# Altium PCB 双红外反射传感器.PcbDoc
Units mm, origin at the board's own origin, x right, y up, seen from the top; angles counter-clockwise.
Board outline 152.4 x 101.6 mm, 2 copper layers (Top Layer, Bottom Layer); 18 components, 12 nets, 50 pads, 0 vias.
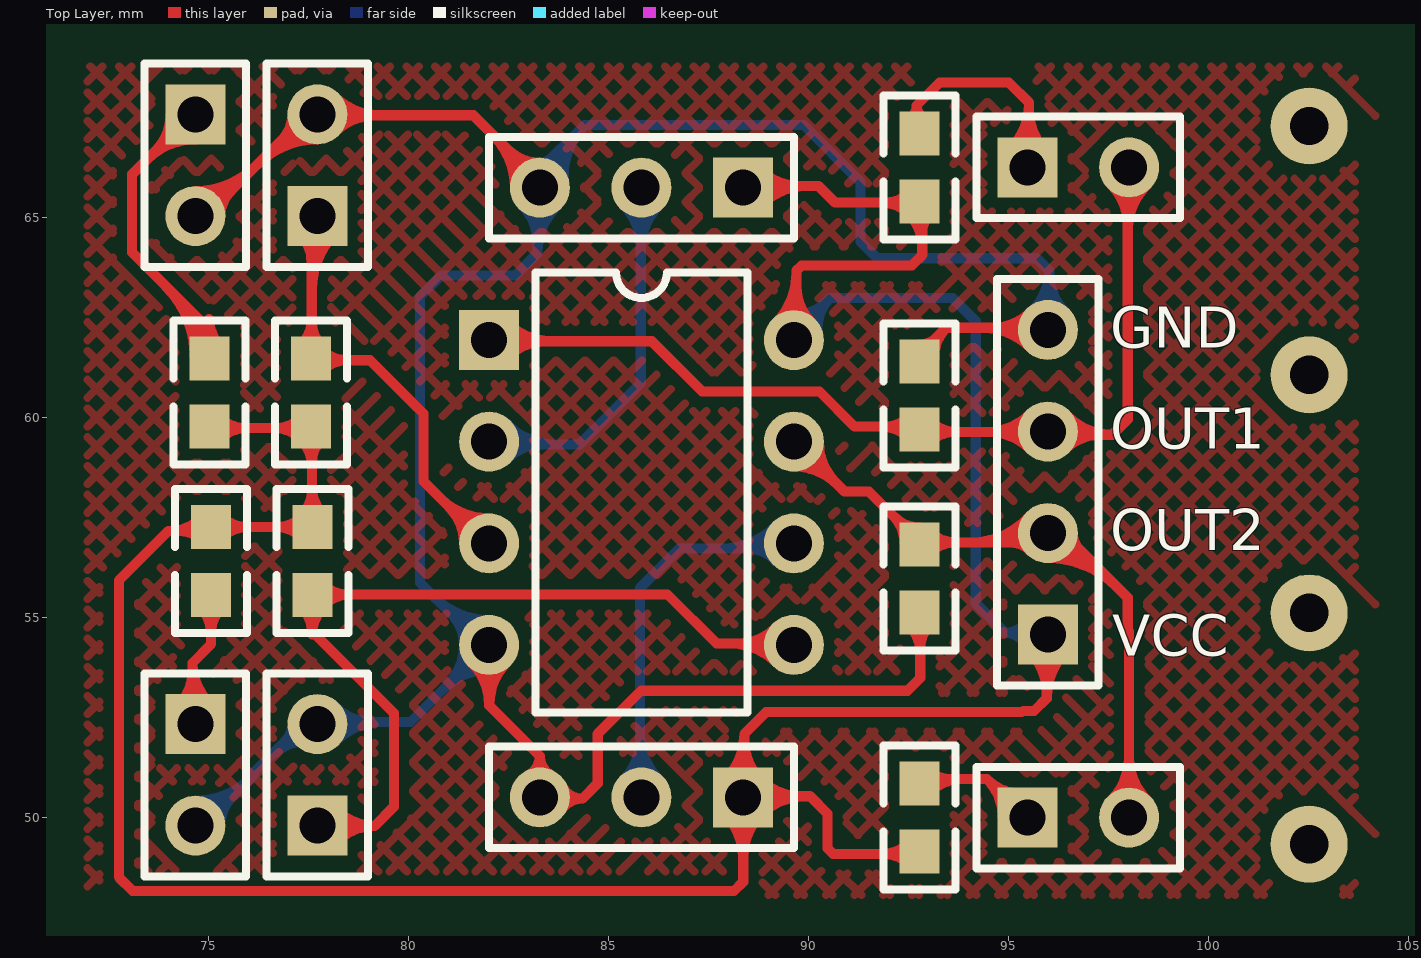
[diagram p0: Top Layer view]
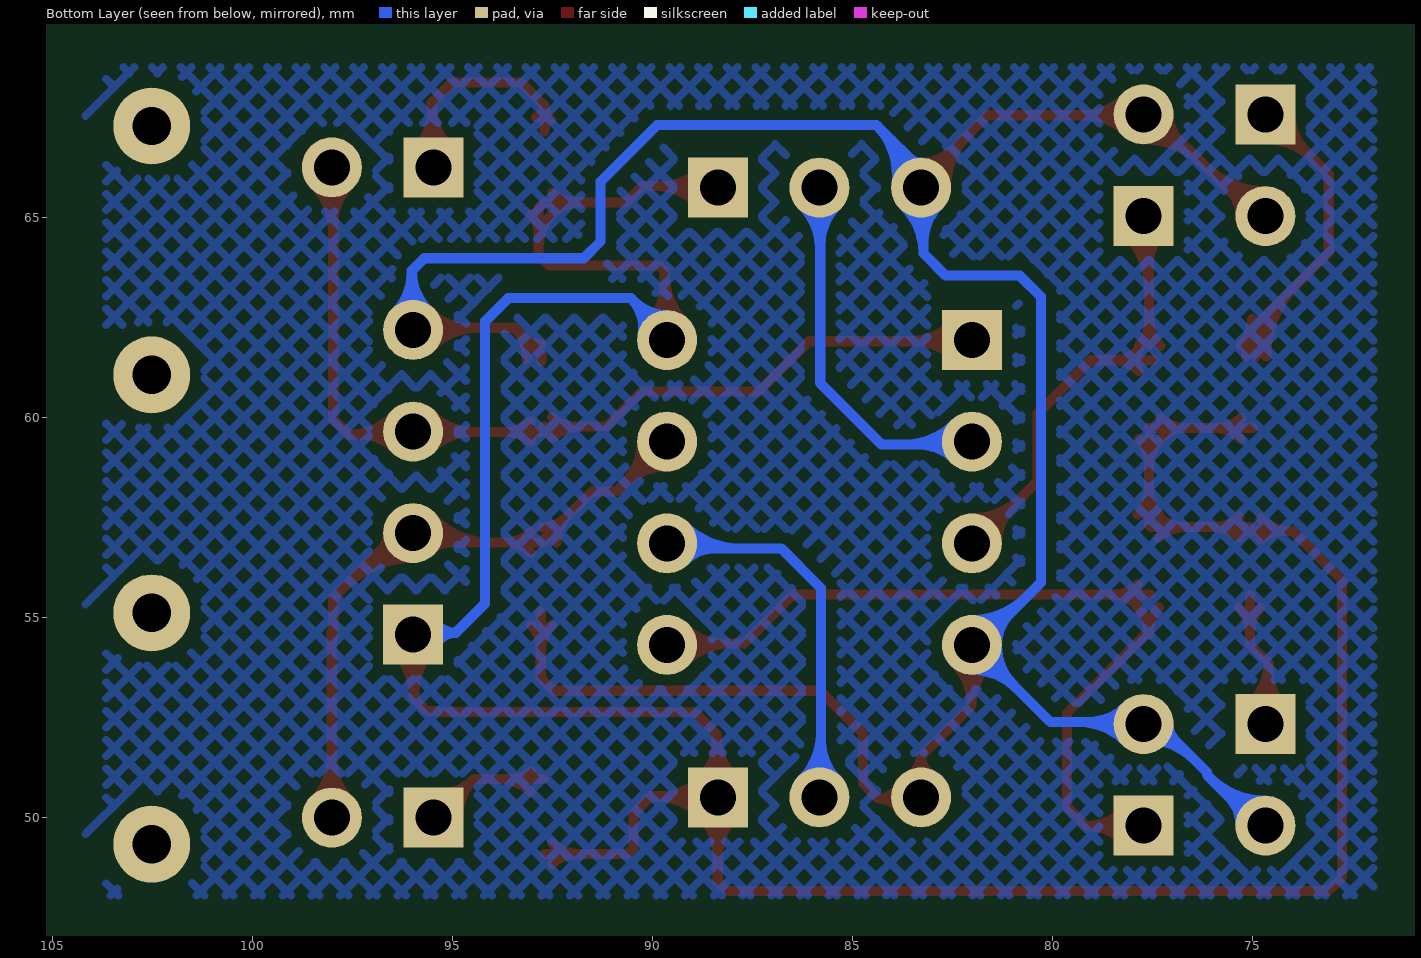
[diagram p1: Bottom Layer view, seen from below]

## Layer stack, top to bottom
Top Layer: signal copper 0.0356
Dielectric: dielectric 0.32, FR-4, Dk 4.8
Bottom Layer: signal copper 0.0356

## Board outline
25.4,25.4 177.8,25.4 177.8,127 25.4,127

## Design rules (kind name [scope] priority, off if disabled: settings)
Clearance [All] p1: gap=0.254
ComponentClearance [All] p1: gap=0.254 collisioncheckmode=3 verticalgap=0.254
PolygonConnect [All] p1: connectstyle=Relief reliefconductorwidth=0.254 reliefentries=4 polygonreliefangle="90 Angle"
RoutingVias [All] p1: holewidth=0.711 width=1.27 viastyle="Through Hole" minholewidth=0.711 minwidth=1.27 maxholewidth=0.711 maxwidth=1.27
SolderMaskExpansion [All] p1: expansion=0.102
TestPointUsage [All] p1: valid=0 allowmultiple=FALSE
Testpoint [All] p1: side=15 testpointundercomponent=TRUE minsize=1.016 maxsize=2.54 preferedsize=1.524 minholesize=0 maxholesize=1.016 preferedholesize=0.813 testpointgrid=0.025 style=1023 order=0-112345678
Width [All] p1: maxlimit=0.254 minlimit=0.254 preferedwidth=0.254
17 further rules are at their usual default settings.

## Components (designator, comment, footprint, x,y, rotation, side; value= is the part's Value field where it differs from the comment)
C1 "" C1608-0603 92.774,60.539 r270 top
C2 "" C1608-0603 92.774,55.967 r90 top
LED1 "" HDR1X2 95.477,66.241 r0 top
LED2 "" HDR1X2 95.477,49.985 r0 top
P1 "" HDR1X4 95.985,54.557 r90 top
R1 "" C1608-0603 75.031,60.614 r270 top
R2 "" C1608-0603 77.571,60.614 r270 top
R3 "" HDR1X3 88.365,65.733 r180 top
R4 "" C1608-0603 92.774,66.241 r270 top
R5 "" C1608-0603 75.066,56.398 r90 top
R6 "" C1608-0603 77.606,56.398 r90 top
R7 "" HDR1X3 88.365,50.493 r180 top
R8 "" C1608-0603 92.774,49.985 r270 top
RIN1 "" HDR1X2 77.724,65.024 r90 top
RIN2 "" HDR1X2 77.724,49.784 r90 top
ROUR1 "" HDR1X2 74.676,67.564 r270 top
ROUR2 "" HDR1X2 74.676,52.324 r270 top
U1 "LM393AD" DIP8 85.825,58.113 r270 top

## Footprints (in the part's own frame and the unit in brackets; to place one, negate y for a bottom-side part, rotate by r counter-clockwise, add the part's x,y. Pads: shape width x height; smd on the part's side, far side on the other; paste and mask are expansions set on the pad)
C1608-0603 [mm] "Chip Resistor; Body 1.6 x 0.8 mm (LxW typ)"
  rect 1.1x1 smd: 1(-0.85,0) 2(0.85,0)
  silkscreen extent -1.8,-0.9 1.8,0.9
DIP8 [mm] "DIP; 8 Leads; Row Spacing 7.62 mm; Pitch 2.54 mm"
  rect 1.5x1.5 hole 0.9: 1(-3.81,-3.81)
  round 1.5 hole 0.9: 2(-1.27,-3.81) 3(1.27,-3.81) 4(3.81,-3.81) 5(3.81,3.81) 6(1.27,3.81) 7(-1.27,3.81) 8(-3.81,3.81)
  silkscreen extent -5.5,-2.65 5.5,2.65
HDR1X2 [mm] "Connector; Header; 2 Position"
  rect 1.5x1.5 hole 0.9: 1(0,0)
  round 1.5 hole 0.9: 2(2.54,0)
  silkscreen extent -1.27,-1.27 3.81,1.27
HDR1X3 [mm] "Connector; Header; 3 Position"
  rect 1.5x1.5 hole 0.9: 1(0,0)
  round 1.5 hole 0.9: 2(2.54,0) 3(5.08,0)
  silkscreen extent -1.27,-1.27 6.35,1.27
HDR1X4 [mm] "Connector; Header; 4 Position"
  rect 1.5x1.5 hole 0.9: 1(0,0)
  round 1.5 hole 0.9: 2(2.54,0) 3(5.08,0) 4(7.62,0)
  silkscreen extent -1.27,-1.27 8.89,1.27

## Part data
C1 C2: library part "Cap Semi", "Capacitor (Semiconductor SIM Model)"
LED1 LED2 ROUR1 ROUR2: library part LED3, "Typical BLUE SiC LED"
P1: library part "Header 4", "Header, 4-Pin"
R1 R2 R4 R5 R6 R8: library part Res2, "Resistor"
R3 R7: library part RPot, "Potentiometer"
RIN1 RIN2: library part "Photo Sen", "Photosensitive Diode"
U1: "Low-Power Dual Voltage Comparator"

## Free pads (board coordinates)
  round 1.924 hole 0.962: 3(102.519,49.321) 3(102.519,55.103) 3(102.519,61.053) 3(102.519,67.276)

## Nets (pads, with @x,y where several pads share a name; then routed paths per layer and width w, separated by ;. In a path a pad name is that pad's centre, name@x,y a point inside that pad or via, vN(x,y) a via of type N, cw(c..) or ccw(c..) an arc to the next point about the centre after c; other vN are vias at no path point)
GND: C1.1 C2.1 P1.4 R3.3 R7.3 RIN1.2 RIN2.2 ROUR1.2 ROUR2.2 U1.4 | length 154.1
  Top Layer w0.254: ROUR1.2@74.569,65.043 74.954,65.043 77.455,67.545 81.625,67.545 R3.3@83.325,65.845 ; ROUR1.2@74.676,65.393 ccw(c74.676,66.908) 75.747,65.837 ; ROUR1.2@74.676,65.647 ccw(c74.676,67.775) 76.181,66.27 ; ROUR1.2@75.299,65.024 cw(c76.179,65.024) 75.557,65.646 ; 76.234,66.324 cw(c77.724,64.834) RIN1.2@77.724,66.941 ; 76.668,66.758 cw(c77.724,65.702) RIN1.2@77.724,67.195 ; 76.837,66.926 ccw(c76.199,67.564) RIN1.2@77.101,67.564 ; RIN1.2@77.985,67.303 cw(c78.569,66.719) 78.569,67.545 ; RIN1.2@77.985,67.825 ccw(c78.661,68.501) 78.661,67.545 ; RIN1.2@78.165,67.123 cw(c79.182,66.106) 79.182,67.545 ; RIN1.2@78.165,68.005 ccw(c79.274,69.114) 79.274,67.545 ; U1.4@82.022,54.244 82.022,52.79 ; 82.115,67.055 cw(c80.793,65.733) R3.3@82.662,65.733 ; 82.48,66.69 ccw(c83.285,67.496) R3.3@83.285,66.356 ; 82.548,66.621 cw(c81.661,65.733) R3.3@82.916,65.733 ; R7.3@83.243,50.46 84.354,50.46 ; R7.3@83.285,50.572 83.285,51.526 82.022,52.79 ; C1.1 92.774,61.558 93.447,62.231 ; C2.1@92.795,55.125 92.795,53.475 92.478,53.157 85.813,53.157 84.734,52.078 84.734,50.841 84.354,50.46 ; P1.4@95.957,62.231 93.447,62.231 ; 82.022,52.79 ccw(c80.51,52.79) 81.576,53.862 cw(c80.51,52.79) 82.022,52.79 ; 83.285,51.526 ccw(c83.829,51.526) 83.576,51.044 cw(c83.829,51.526) 83.285,51.526 ; 83.285,51.526 cw(c82.742,51.526) 82.995,51.045 ccw(c82.742,51.526) 83.285,51.526 ; 84.353,50.46 ccw(c84.353,49.82) 83.812,50.161 cw(c84.353,49.82) 84.353,50.46 ; 84.353,50.46 cw(c84.353,51.034) 83.841,50.775 ccw(c84.353,51.034) 84.353,50.46 ; 93.447,62.231 ccw(c94.174,61.504) 93.147,61.456 cw(c94.174,61.504) 93.447,62.231 ; U1.4@81.755,54.042 cw(c81.117,53.4) 82.022,53.4 ccw(c81.117,53.4) U1.4@81.755,54.042 ; 82.022,52.815 cw(c83.504,52.815) 82.456,53.863 ccw(c83.504,52.815) 82.022,52.815 ; 82.022,53.428 cw(c82.891,53.428) 82.276,54.042 ccw(c82.891,53.428) 82.022,53.428 ; C2.1@92.511,54.803 cw(c91.824,54.117) 92.795,54.117 ccw(c91.824,54.117) C2.1@92.511,54.803 ; C1.1@92.774,61.812 ccw(c92.774,62.426) 93.208,61.992 cw(c92.774,62.426) C1.1@92.774,61.812 ; 92.795,54.217 cw(c93.625,54.217) 93.038,54.803 ccw(c93.625,54.217) 92.795,54.217 ; 94.352,62.231 cw(c94.352,60.544) 95.545,61.737 ccw(c94.352,60.544) 94.352,62.231 ; 94.61,62.231 ccw(c94.61,63.552) 95.545,62.618 cw(c94.61,63.552) 94.61,62.231 ; 94.965,62.231 cw(c94.965,61.157) 95.724,61.916 ccw(c94.965,61.157) 94.965,62.231 ; 95.223,62.231 ccw(c95.223,62.939) 95.724,62.438 cw(c95.223,62.939) 95.223,62.231
  Bottom Layer w0.254: ROUR2.2@74.665,49.809 74.89,49.809 76.14,51.06 76.14,51.124 77.263,52.246 77.84,52.246 77.969,52.375 80.053,52.375 U1.4@82.01,54.331 ; ROUR2.2@74.676,50.153 ccw(c74.676,51.5) 75.628,50.547 ; ROUR2.2@74.676,50.407 ccw(c74.676,52.367) 76.062,50.981 ; ROUR2.2@75.299,49.784 cw(c76.347,49.784) 75.606,50.525 ; 76.44,51.423 cw(c77.724,50.139) RIN2.2@77.724,51.955 ; 76.873,51.857 cw(c77.724,51.006) RIN2.2@77.724,52.209 ; 76.932,51.915 ccw(c76.522,52.324) RIN2.2@77.101,52.324 ; RIN2.2@77.985,52.063 cw(c78.737,51.311) 78.737,52.375 ; RIN2.2@77.985,52.585 ccw(c78.493,53.093) 78.493,52.375 ; RIN2.2@78.165,51.883 cw(c79.35,50.698) 79.35,52.375 ; RIN2.2@78.165,52.765 ccw(c79.106,53.706) 79.106,52.375 ; 80.895,53.216 cw(c82.015,52.096) U1.4@82.015,53.68 ; 80.975,53.297 ccw(c79.968,54.303) U1.4@81.392,54.303 ; 81.329,53.65 cw(c82.015,52.963) U1.4@82.015,53.934 ; 81.409,53.73 ccw(c80.836,54.303) U1.4@81.646,54.303 ; U1.4@81.827,54.319 80.291,55.855 80.291,63.011 80.815,63.535 82.665,63.535 83.224,64.093 R3.3@83.224,65.664 ; R3.3@83.247,66.147 84.401,67.301 ; P1.4@96.02,62.186 96.02,63.655 ; U1.4@81.392,54.303 ccw(c80.304,54.303) 81.074,55.073 cw(c80.304,54.303) U1.4@81.392,54.303 ; 84.401,67.301 ccw(c85.645,66.057) 83.902,65.818 cw(c85.645,66.057) 84.401,67.301 ; 84.401,67.301 89.883,67.301 91.299,65.884 91.299,64.389 91.719,63.97 95.705,63.97 96.02,63.655 ; 96.02,63.655 cw(c94.655,63.655) 95.568,62.64 ccw(c94.655,63.655) 96.02,63.655 ; 80.657,55.489 ccw(c82.015,56.847) 82.015,54.926 cw(c82.015,56.847) 80.657,55.489 ; 81.091,55.055 ccw(c82.015,55.979) 82.015,54.672 cw(c82.015,55.979) 81.091,55.055 ; R3.3@82.845,65.293 cw(c81.93,64.378) 83.224,64.378 ccw(c81.93,64.378) R3.3@82.845,65.293 ; 83.224,64.092 cw(c84.91,64.092) 83.724,65.291 ccw(c84.91,64.092) 83.224,64.092 ; 83.224,64.701 cw(c84.307,64.701) 83.545,65.471 ccw(c84.307,64.701) 83.224,64.701 ; R3.3@83.285,66.356 ccw(c83.285,66.771) 83.578,66.478 cw(c83.285,66.771) R3.3@83.285,66.356 ; R3.3@83.399,65.749 cw(c84.372,65.883) 83.678,66.577 ccw(c84.372,65.883) R3.3@83.399,65.749 ; R3.3@83.651,65.784 cw(c85.009,65.97) 84.039,66.939 ccw(c85.009,65.97) R3.3@83.651,65.784 ; P1.4@95.738,62.452 ccw(c95.169,63.085) 96.02,63.085 cw(c95.169,63.085) P1.4@95.738,62.452 ; 96.02,62.984 ccw(c96.792,62.984) 96.246,62.438 cw(c96.792,62.984) 96.02,62.984 ; 96.02,63.597 ccw(c97.405,63.597) 96.426,62.618 cw(c97.405,63.597) 96.02,63.597
NetC1_2: C1.2 LED1.2 P1.3 U1.1 | length 58.1
  Top Layer w0.254: U1.1@81.897,61.894 86.086,61.894 87.343,60.637 90.275,60.637 91.148,59.765 C1.2@92.719,59.765 ; C1.2@92.722,59.623 95.929,59.623 95.993,59.559 97.597,59.559 ; C1.2@93.043,59.403 C1.2@93.043,59.49 ; LED1.2@97.982,66.294 97.982,59.944 97.597,59.559 ; 97.597,59.559 cw(c97.597,61.138) 96.441,60.062 ccw(c97.597,61.138) 97.597,59.559 ; U1.1@82.276,61.662 cw(c82.835,61.103) 82.835,61.894 ccw(c82.835,61.103) U1.1@82.276,61.662 ; U1.1@82.276,62.184 ccw(c82.977,62.885) 82.977,61.894 cw(c82.977,62.885) U1.1@82.276,62.184 ; U1.1@82.456,61.483 cw(c83.449,60.49) 83.449,61.894 ccw(c83.449,60.49) U1.1@82.456,61.483 ; U1.1@82.456,62.364 ccw(c83.59,63.498) 83.59,61.894 cw(c83.59,63.498) U1.1@82.456,62.364 ; 91.813,59.765 cw(c91.813,58.777) 92.511,59.475 ccw(c91.813,58.777) 91.813,59.765 ; 91.935,59.765 ccw(c91.935,60.578) 92.511,60.003 cw(c91.935,60.578) 91.935,59.765 ; C1.2@93.038,59.375 cw(c93.636,58.778) 93.636,59.623 ccw(c93.636,58.778) C1.2@93.038,59.375 ; C1.2@93.038,59.903 ccw(c93.714,60.579) 93.714,59.623 cw(c93.714,60.579) C1.2@93.038,59.903 ; 94.446,59.623 ccw(c94.446,61.176) 95.545,60.078 cw(c94.446,61.176) 94.446,59.623 ; 94.516,59.623 cw(c94.516,58.168) 95.545,59.197 ccw(c94.516,58.168) 94.516,59.623 ; 95.06,59.623 ccw(c95.06,60.563) 95.724,59.898 cw(c95.06,60.563) 95.06,59.623 ; 95.129,59.623 cw(c95.129,58.781) 95.724,59.376 ccw(c95.129,58.781) 95.129,59.623 ; P1.3@96.255,59.889 ccw(c97.013,60.595) 97.013,59.559 cw(c97.013,60.595) P1.3@96.255,59.889 ; P1.3@96.426,59.197 cw(c97.3,58.323) 97.3,59.559 ccw(c97.3,58.323) P1.3@96.426,59.197 ; LED1.2@97.577,65.801 cw(c96.599,64.823) 97.982,64.823 ccw(c96.599,64.823) LED1.2@97.577,65.801 ; LED1.2@97.756,65.98 cw(c97.212,65.436) 97.982,65.436 ccw(c97.212,65.436) LED1.2@97.756,65.98 ; 97.982,64.652 cw(c99.607,64.652) 98.458,65.801 ccw(c99.607,64.652) 97.982,64.652 ; 97.982,65.265 cw(c98.994,65.265) 98.278,65.98 ccw(c98.994,65.265) 97.982,65.265
NetC2_2: C2.2 LED2.2 P1.2 U1.7 | length 54.5
  Top Layer w0.254: U1.7 89.659,59.383 90.908,58.134 91.514,58.134 C2.2@92.755,56.893 ; C2.2@92.726,56.865 94.14,56.865 ; 97.982,54.491 97.982,55.486 96.314,57.153 95.961,57.153 95.673,56.865 94.069,56.865 ; LED2.2 98.017,54.632 ; 94.069,56.865 ccw(c94.069,58.815) 95.521,57.513 cw(c94.069,58.815) 94.069,56.865 ; 98.017,50.876 ccw(c98.908,50.876) 98.278,50.246 cw(c98.908,50.876) 98.017,50.876 ; 98.017,50.876 cw(c97.126,50.876) 97.756,50.246 ccw(c97.126,50.876) 98.017,50.876 ; 98.017,51.489 ccw(c99.521,51.489) 98.458,50.426 cw(c99.521,51.489) 98.017,51.489 ; 98.017,51.489 cw(c96.513,51.489) 97.577,50.426 ccw(c96.513,51.489) 98.017,51.489 ; U1.7@89.635,58.76 cw(c89.635,57.199) 90.739,58.303 ccw(c89.635,57.199) U1.7@89.635,58.76 ; U1.7@89.635,59.014 cw(c89.635,58.066) 90.306,58.737 ccw(c89.635,58.066) U1.7@89.635,59.014 ; U1.7@90.004,59.383 ccw(c90.838,59.383) 90.248,58.794 cw(c90.838,59.383) U1.7@90.004,59.383 ; U1.7@90.258,59.383 ccw(c91.705,59.383) 90.682,58.361 cw(c91.705,59.383) U1.7@90.258,59.383 ; 92.133,57.515 cw(c91.485,56.867) 92.401,56.867 ccw(c91.485,56.867) 92.133,57.515 ; 92.149,57.499 ccw(c92.774,58.125) 92.774,57.24 cw(c92.774,58.125) 92.149,57.499 ; C2.2@93.038,56.603 cw(c93.669,55.973) 93.669,56.865 ccw(c93.669,55.973) C2.2@93.038,56.603 ; C2.2@93.038,57.131 ccw(c93.681,57.774) 93.681,56.865 cw(c93.681,57.774) C2.2@93.038,57.131 ; 94.638,56.865 ccw(c94.638,58.305) 95.71,57.344 cw(c94.638,58.305) 94.638,56.865 ; 95.043,56.865 cw(c95.043,56.155) 95.545,56.657 ccw(c95.043,56.155) 95.043,56.865 ; 95.207,56.865 ccw(c95.207,57.795) 95.9,57.174 cw(c95.207,57.795) 95.207,56.865 ; P1.2@95.985,56.474 cw(c95.985,54.041) 97.706,55.762 ccw(c95.985,54.041) P1.2@95.985,56.474 ; P1.2@95.985,56.728 cw(c95.985,54.908) 97.272,56.195 ccw(c95.985,54.908) P1.2@95.985,56.728 ; P1.2@95.985,56.982 cw(c95.985,55.776) 96.839,56.629 ccw(c95.985,55.776) P1.2@95.985,56.982 ; P1.2@96.608,57.097 ccw(c97.183,57.097) 96.777,56.691 cw(c97.183,57.097) P1.2@96.608,57.097
NetLED1_1: LED1.1 R4.1 | length 14.6
  Top Layer w0.254: R4.1@92.704,67.143 92.704,67.787 ; LED1.1@95.517,66.285 95.517,67.859 95.016,68.359 93.276,68.359 92.704,67.787 ; 92.704,67.787 ccw(c93.022,67.787) 92.908,67.49 cw(c93.022,67.787) 92.704,67.787 ; 92.704,67.787 cw(c92.235,67.787) 92.535,67.428 ccw(c92.235,67.787) 92.704,67.787 ; LED1.1@95.037,66.682 ccw(c93.877,67.842) 95.517,67.842 cw(c93.877,67.842) LED1.1@95.037,66.682 ; LED1.1@95.216,66.502 ccw(c94.49,67.228) 95.517,67.228 cw(c94.49,67.228) LED1.1@95.216,66.502 ; 95.517,67.036 ccw(c96.272,67.036) 95.738,66.502 cw(c96.272,67.036) 95.517,67.036 ; 95.517,67.649 ccw(c96.885,67.649) 95.918,66.682 cw(c96.885,67.649) 95.517,67.649
NetLED2_1: LED2.1 R8.1 | length 12.3
  Top Layer w0.254: R8.1@92.726,50.95 94.457,50.95 LED2.1@95.351,50.056 ; 94.485,50.923 ccw(c95.272,51.71) 95.404,50.604 cw(c95.272,51.71) 94.485,50.923 ; 94.485,50.922 cw(c93.591,50.029) 94.854,50 ccw(c93.591,50.029) 94.485,50.922 ; R8.1@93.038,50.622 cw(c93.832,49.828) 93.832,50.95 ccw(c93.832,49.828) R8.1@93.038,50.622 ; R8.1@93.038,51.149 ccw(c93.518,51.629) 93.518,50.95 cw(c93.518,51.629) R8.1@93.038,51.149 ; LED2.1@94.855,50.552 ccw(c95.351,51.049) 95.434,50.352 cw(c95.351,51.049) LED2.1@94.855,50.552 ; LED2.1@94.904,50.503 cw(c94.412,50.01) 95.108,49.994 ccw(c94.412,50.01) LED2.1@94.904,50.503
NetR1_1: R1.1 ROUR1.1 | length 17.2
  Top Layer w0.254: 73.462,66.438 cw(c74.676,65.224) ROUR1.1@74.676,66.941 ; 73.675,66.651 ccw(c72.762,67.564) ROUR1.1@74.053,67.564 ; 73.896,66.872 cw(c74.676,66.091) ROUR1.1@74.676,67.195 ; 73.926,63.28 cw(c72.16,61.514) R1.1@74.658,61.514 ; 74.36,62.847 cw(c73.027,61.514) R1.1@74.912,61.514 ; ROUR1.1@74.665,67.641 73.093,66.07 73.093,64.113 75.082,62.125 ; R1.1@74.767,61.778 ccw(c74.164,62.381) 75.017,62.381 ; 74.793,62.413 cw(c73.894,61.514) R1.1@75.166,61.514 ; R1.1@74.901,61.864 ccw(c74.804,62.125) 75.082,62.125 ; 75.017,62.449 ccw(c75.965,62.449) R1.1@75.294,61.778 ; R1.1@75.082,61.644 75.082,62.125 ; R1.1@75.241,61.822 cw(c75.449,62.125) 75.082,62.125
NetR2_1: R2.1 RIN1.1 U1.3 | length 26.2
  Top Layer w0.254: RIN1.1@77.283,64.583 cw(c76.559,63.859) 77.584,63.859 ; R2.1@77.491,61.421 79.041,61.421 80.376,60.086 80.376,58.393 U1.3@81.95,56.819 ; 77.582,62.388 ccw(c78.444,62.388) 77.834,61.778 cw(c78.44,62.384) 77.584,62.384 ; 77.582,62.442 cw(c76.643,62.442) 77.307,61.778 ccw(c76.639,62.446) 77.584,62.446 ; R2.1@77.584,61.804 RIN1.1@77.584,65.043 ; 77.584,63.181 cw(c79.567,63.181) RIN1.1@78.165,64.583 ; 77.584,63.794 cw(c78.954,63.794) RIN1.1@77.985,64.763 ; R2.1@77.834,61.151 cw(c78.487,60.498) 78.487,61.421 ccw(c78.487,60.498) R2.1@77.834,61.151 ; R2.1@77.834,61.678 ccw(c78.455,62.299) 78.455,61.421 cw(c78.455,62.299) R2.1@77.834,61.678 ; 80.799,57.97 ccw(c82.015,59.186) 82.015,57.466 cw(c82.015,59.186) 80.799,57.97 ; 81.015,57.754 cw(c80.104,56.843) 81.392,56.843 ccw(c80.104,56.843) 81.015,57.754 ; 81.233,57.536 ccw(c82.015,58.319) 82.015,57.212 cw(c82.015,58.319) 81.233,57.536
NetR3_3: R3.2 U1.2 | length 23.4
  Bottom Layer w0.254: U1.2@81.897,59.311 84.271,59.311 85.807,60.847 R3.2@85.807,65.664 ; U1.2@82.276,59.644 ccw(c83.081,60.449) 83.081,59.311 cw(c83.081,60.449) U1.2@82.276,59.644 ; U1.2@82.456,58.943 cw(c83.344,58.054) 83.344,59.311 ccw(c83.344,58.054) U1.2@82.456,58.943 ; U1.2@82.456,59.824 ccw(c83.694,61.062) 83.694,59.311 cw(c83.694,61.062) U1.2@82.456,59.824 ; R3.2@85.385,65.293 cw(c84.365,64.273) 85.807,64.273 ccw(c84.365,64.273) R3.2@85.385,65.293 ; R3.2@85.564,65.472 cw(c84.978,64.887) 85.807,64.887 ccw(c84.978,64.887) R3.2@85.564,65.472 ; 85.807,64.185 cw(c87.373,64.185) 86.266,65.293 ccw(c87.373,64.185) 85.807,64.185 ; 85.807,64.799 cw(c86.76,64.799) 86.086,65.472 ccw(c86.76,64.799) 85.807,64.799
NetR5_1: R5.1 ROUR2.1 | length 9.1
  Top Layer w0.254: ROUR2.1@74.235,52.765 ccw(c73.353,53.647) 74.601,53.647 ; ROUR2.1@74.601,52.439 74.601,53.85 75.05,54.299 ; 74.601,53.295 ccw(c75.515,53.295) ROUR2.1@74.917,52.603 ; 74.601,53.85 ccw(c75.994,53.85) ROUR2.1@75.083,52.795 ; 75.066,54.322 R5.1 ; 75.066,54.597 ccw(c74.165,54.597) 74.802,55.234 cw(c74.165,54.597) 75.066,54.597 ; 75.066,54.597 cw(c75.966,54.597) 75.33,55.234 ccw(c75.966,54.597) 75.066,54.597
NetR6_1: R6.1 RIN2.1 U1.5 | length 35.1
  Top Layer w0.254: R6.1@77.342,55.234 cw(c76.737,54.629) 77.593,54.629 ; R6.1@77.568,55.565 86.477,55.565 87.706,54.336 U1.5@89.626,54.336 ; 77.593,54.566 cw(c78.538,54.566) R6.1@77.87,55.234 ; 77.616,54.652 77.616,54.62 79.636,52.599 79.636,50.258 79.155,49.777 ; RIN2.1@77.744,49.777 79.155,49.777 ; RIN2.1@77.992,49.53 cw(c78.565,48.988) 78.565,49.777 ; RIN2.1@77.996,50.033 ccw(c78.578,50.566) 78.578,49.777 ; RIN2.1@78.176,49.356 cw(c79.155,48.429) 79.155,49.777 ; RIN2.1@78.184,50.205 ccw(c79.155,51.093) 79.155,49.777 ; R6.1@77.87,55.284 cw(c78.548,54.605) 78.548,55.565 ccw(c78.548,54.605) R6.1@77.87,55.284 ; R6.1@77.87,55.811 ccw(c78.464,56.406) 78.464,55.565 cw(c78.464,56.406) R6.1@77.87,55.811 ; 88.052,54.336 cw(c88.052,52.72) 89.195,53.863 ccw(c88.052,52.72) 88.052,54.336 ; 88.211,54.336 ccw(c88.211,55.728) 89.195,54.744 cw(c88.211,55.728) 88.211,54.336 ; 88.665,54.336 cw(c88.665,53.333) 89.374,54.042 ccw(c88.665,53.333) 88.665,54.336 ; 88.824,54.336 ccw(c88.824,55.115) 89.374,54.564 cw(c88.824,55.115) 88.824,54.336
NetR7_3: R7.2 U1.6 | length 23.8
  Bottom Layer w0.254: R7.2@85.786,50.496 85.786,55.719 86.784,56.717 U1.6@89.626,56.717 ; R7.2@85.385,50.934 ccw(c84.416,51.903) 85.786,51.903 cw(c84.416,51.903) R7.2@85.385,50.934 ; R7.2@85.564,50.754 ccw(c85.029,51.29) 85.786,51.29 cw(c85.029,51.29) R7.2@85.564,50.754 ; 85.786,51.479 ccw(c86.811,51.479) 86.086,50.754 cw(c86.811,51.479) 85.786,51.479 ; 85.786,52.092 ccw(c87.424,52.092) 86.266,50.934 cw(c87.424,52.092) 85.786,52.092 ; 87.826,56.717 ccw(c87.826,58.652) 89.195,57.284 cw(c87.826,58.652) 87.826,56.717 ; 88.436,56.717 cw(c88.436,55.644) 89.195,56.403 ccw(c88.436,55.644) 88.436,56.717 ; 88.44,56.717 ccw(c88.44,58.039) 89.374,57.104 cw(c88.44,58.039) 88.44,56.717
VCC: P1.1 R1.2 R2.2 R3.1 R4.2 R5.2 R6.2 R7.1 R8.2 U1.8 | length 157.5
  Top Layer w0.254: R1.2@74.988,59.728 R2.2@77.611,59.728 ; R5.2 77.54,57.248 77.587,57.295 R2.2@77.587,59.513 ; R5.2@75.185,57.153 74.002,57.153 72.761,55.913 72.761,48.498 73.108,48.152 88.139,48.152 88.37,48.383 R7.1@88.37,50.546 ; R3.1@88.335,65.779 90.25,65.779 90.67,65.36 92.715,65.36 92.847,65.229 92.847,64.048 92.584,63.786 89.83,63.786 89.699,63.655 U1.8@89.699,62.003 ; R8.2@92.697,49.075 90.62,49.075 90.476,49.219 90.476,50.085 90.043,50.517 88.398,50.517 88.398,52.075 ; 95.323,52.624 88.947,52.624 88.398,52.075 ; 95.38,52.652 95.64,52.652 95.957,52.97 P1.1@95.957,54.528 ; 75.966,57.248 ccw(c75.966,56.347) 75.33,56.984 cw(c75.966,56.347) 75.966,57.248 ; 75.966,57.248 cw(c75.966,58.148) 75.33,57.511 ccw(c75.966,58.148) 75.966,57.248 ; 76.705,57.248 ccw(c76.705,58.148) 77.342,57.511 cw(c76.705,58.148) 76.705,57.248 ; 76.705,57.248 cw(c76.705,56.347) 77.342,56.984 ccw(c76.705,56.347) 76.705,57.248 ; R2.2@77.307,59.451 ccw(c76.637,58.781) 76.637,59.728 cw(c76.637,58.781) R2.2@77.307,59.451 ; R2.2@77.307,59.451 cw(c76.631,58.775) 77.587,58.775 ccw(c76.631,58.775) R2.2@77.307,59.451 ; 88.398,52.075 cw(c86.786,52.075) 87.925,50.934 ccw(c86.786,52.075) 88.398,52.075 ; R7.1@88.626,50.232 ccw(c89.246,49.613) 88.37,49.613 cw(c89.246,49.613) R7.1@88.626,50.232 ; R7.1@88.626,50.232 cw(c89.314,49.544) 89.314,50.517 ccw(c89.314,49.544) R7.1@88.626,50.232 ; R7.1@88.626,50.754 ccw(c89.198,51.326) 89.198,50.517 cw(c89.198,51.326) R7.1@88.626,50.754 ; R7.1@88.626,50.754 cw(c89.176,51.304) 88.398,51.304 ccw(c89.176,51.304) R7.1@88.626,50.754 ; R7.1@88.806,50.053 ccw(c89.859,49) 88.37,49 cw(c89.859,49) R7.1@88.806,50.053 ; R7.1@88.806,50.053 cw(c89.927,48.931) 89.927,50.517 ccw(c89.927,48.931) R7.1@88.806,50.053 ; R7.1@88.806,50.934 ccw(c89.811,51.939) 89.811,50.517 cw(c89.811,51.939) R7.1@88.806,50.934 ; R7.1@88.806,50.934 cw(c89.789,51.917) 88.398,51.917 ccw(c89.789,51.917) R7.1@88.806,50.934 ; R4.2@92.511,65.078 ccw(c91.83,64.396) 91.83,65.36 cw(c91.83,64.396) R4.2@92.511,65.078 ; R4.2@92.511,65.078 cw(c91.7,64.267) 92.847,64.267 ccw(c91.7,64.267) R4.2@92.511,65.078 ; 74.058,57.153 ccw(c74.058,58.206) 74.802,57.461 cw(c74.058,58.206) 74.058,57.153 ; 74.273,57.153 cw(c74.273,56.405) 74.802,56.934 ccw(c74.273,56.405) 74.273,57.153 ; R1.2@75.294,59.451 cw(c75.964,58.781) 75.964,59.728 ccw(c75.964,58.781) R1.2@75.294,59.451 ; R1.2@75.294,59.978 ccw(c75.898,60.582) 75.898,59.728 cw(c75.898,60.582) R1.2@75.294,59.978 ; 76.703,59.728 ccw(c76.703,60.582) 77.307,59.978 cw(c76.703,60.582) 76.703,59.728 ; R6.2@77.342,57.561 ccw(c76.751,58.152) 77.587,58.152 cw(c76.751,58.152) R6.2@77.342,57.561 ; 77.587,58.244 ccw(c78.552,58.244) 77.87,57.561 cw(c78.552,58.244) 77.587,58.244 ; 77.587,58.853 cw(c78.432,58.853) 77.834,59.451 ccw(c78.432,58.853) 77.587,58.853 ; R7.1@87.925,50.053 cw(c86.851,48.979) 88.37,48.979 ccw(c86.851,48.979) R7.1@87.925,50.053 ; R7.1@88.104,50.232 cw(c87.464,49.592) 88.37,49.592 ccw(c87.464,49.592) R7.1@88.104,50.232 ; R7.1@88.105,50.755 ccw(c87.397,51.463) 88.398,51.463 cw(c87.397,51.463) R7.1@88.105,50.755 ; R3.1@88.626,65.472 cw(c89.367,64.731) 89.367,65.779 ccw(c89.367,64.731) R3.1@88.626,65.472 ; R3.1@88.626,65.994 ccw(c89.145,66.513) 89.145,65.779 cw(c89.145,66.513) R3.1@88.626,65.994 ; R3.1@88.806,65.293 cw(c89.981,64.118) 89.981,65.779 ccw(c89.981,64.118) R3.1@88.806,65.293 ; R3.1@88.806,66.174 ccw(c89.758,67.126) 89.758,65.779 cw(c89.758,67.126) R3.1@88.806,66.174 ; U1.8@89.195,62.364 ccw(c87.977,63.582) 89.699,63.582 cw(c87.977,63.582) U1.8@89.195,62.364 ; U1.8@89.374,62.184 ccw(c88.59,62.969) 89.699,62.969 cw(c88.59,62.969) U1.8@89.374,62.184 ; 89.699,63.273 ccw(c90.985,63.273) 90.076,62.364 cw(c90.985,63.273) 89.699,63.273 ; 91.849,49.075 ccw(c91.849,50.011) 92.511,49.349 cw(c91.849,50.011) 91.849,49.075 ; 91.899,49.075 cw(c91.899,48.21) 92.511,48.822 ccw(c91.899,48.21) 91.899,49.075 ; 91.918,65.36 ccw(c91.918,66.197) 92.511,65.605 cw(c91.918,66.197) 91.918,65.36 ; 92.847,64.615 cw(c93.501,64.615) 93.038,65.078 ccw(c93.501,64.615) 92.847,64.615 ; P1.1@95.545,54.117 cw(c94.549,53.121) 95.957,53.121 ccw(c94.549,53.121) P1.1@95.545,54.117 ; P1.1@95.724,54.296 cw(c95.162,53.734) 95.957,53.734 ccw(c95.162,53.734) P1.1@95.724,54.296 ; 95.957,52.986 cw(c97.557,52.986) 96.426,54.117 ccw(c97.557,52.986) 95.957,52.986 ; 95.957,53.599 cw(c96.944,53.599) 96.246,54.296 ccw(c96.944,53.599) 95.957,53.599
  Bottom Layer w0.254: U1.8@89.568,62.003 90.539,62.973 ; P1.1@95.889,54.606 94.919,54.606 ; 90.539,62.973 ccw(c91.283,62.229) 90.248,62.037 cw(c91.283,62.229) 90.539,62.973 ; 90.539,62.973 93.607,62.973 94.184,62.396 94.184,55.341 94.919,54.606 ; 94.919,54.606 ccw(c94.919,55.261) 95.465,54.901 cw(c94.919,55.261) 94.919,54.606 ; 94.919,54.606 cw(c94.919,54.047) 95.423,54.288 ccw(c94.919,54.047) 94.919,54.606 ; U1.8@89.635,62.546 ccw(c89.635,63.697) 90.449,62.883 cw(c89.635,63.697) U1.8@89.635,62.546 ; U1.8@89.998,61.991 cw(c90.707,62.122) 90.197,62.632 ccw(c90.707,62.122) U1.8@89.998,61.991

## Polygon pours and split planes (outlines as drawn)
no net on Top Layer (hatched 45Degree grid 0.508 track 0.203): 71.939,68.763 103.664,68.763 103.664,48.049 71.977,48.049 71.977,68.724
no net on Bottom Layer (hatched 45Degree grid 0.508 track 0.203): 71.931,68.745 103.655,68.745 103.655,48.034 71.971,48.034 71.971,68.725

## Silkscreen, mask and mechanical layers (free items; w line width, h text height)
Top Overlay:
  text "GND" at 97.545,61.731 h1.02
  text "OUT1" at 97.545,59.201 h1.02
  text "OUT2" at 97.545,56.672 h1.02
  text "VCC" at 97.601,54.029 h1.02
Mechanical 1:
  lines w0.254: 71.634,69.117 71.634,47.688 103.879,47.688 104.015,47.824 104.005,69.051 ; 71.651,69.071 103.911,69.118